# EAGLE board USBPowerCut (EAGLE 9.6.2)
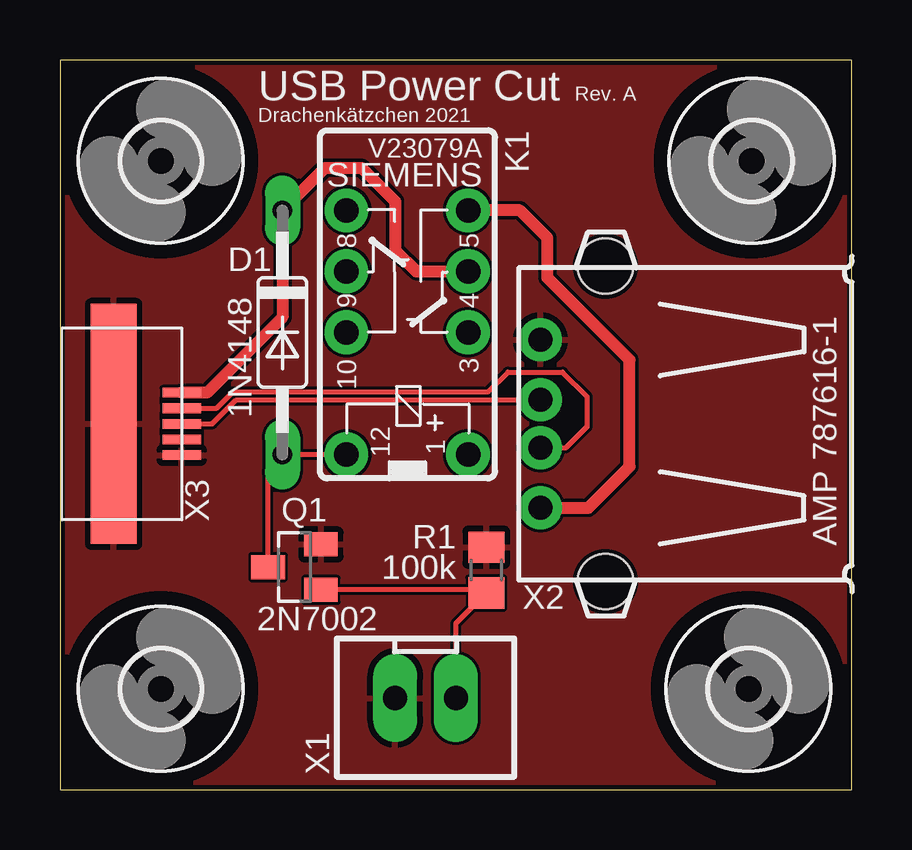
[diagram p0: board, top side]
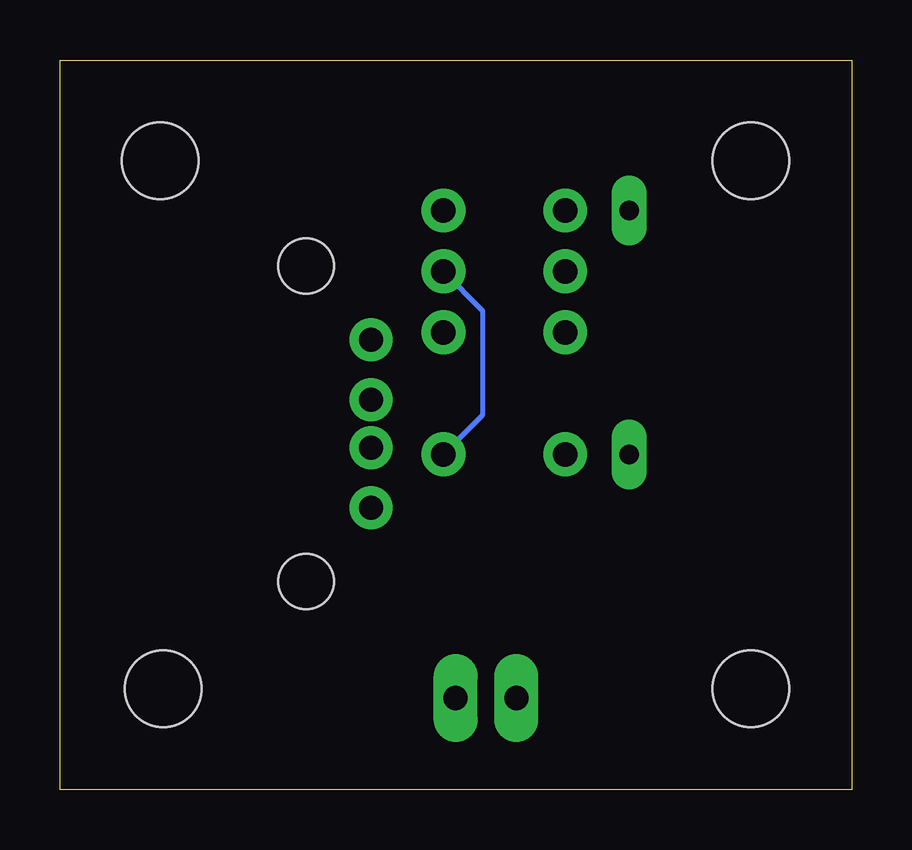
[diagram p1: board, bottom side, seen from below]

Size 33 x 30.4 mm. Coordinates in mm from the lower left corner, seen from the top.
Outline: 0,0 33,0 33,30.4 0,30.4 0,0
Copper layers (1*16): Top 0.035mm / dielectric 1.6mm / Bottom 0.035mm
Design rules "jlcpcb-2layers": minimum track width 5mil, minimum drill 0.3mm, track to track 5mil, track to pad 5mil, pad to pad 5mil, via to via 5mil, smd to smd 5mil, copper to edge 0.2mm, drill to drill 6mil, minimum pad ring 10mil, minimum via ring 3mil, stop-mask expansion 4mil, vias tented up to drill 0mil, thermal gap 10mil

## Footprints (pad centres in the part's own frame; a part is rotated, then mirrored left to right if it is on the bottom)
DO35-10 = drill 0.813 long: A 5.08,0; C -5.08,0
V23079A = drill 1.016 pad 1.778: 1 -5.08,-2.54; 3 0,-2.54; 4 2.54,-2.54; 5 5.08,-2.54; 8 5.08,2.54; 9 2.54,2.54; 10 0,2.54; 12 -5.08,2.54
SOT23 = smd 1 x 1.4: 1 -0.95,-1.1; 2 0.95,-1.1; 3 0,1.1
R0805 = smd 1.3 x 1.5: 1 -0.95,0; 2 0.95,0
3,2 = hole 3.2: 0,0
JST-XH-02-PACKAGE-LONG-PAD = drill 1.016 long: 1 -1.27,0; 2 1.27,0
USB = drill 1: 1 -3.5,12.99; 2 -1,12.99; 3 1,12.99; 4 3.5,12.99 | hole 2.3: -6.57,10.28; 6.57,10.28
MICRO_USB = smd 0.4 x 1.6: 1 -1.3,0; 2 -0.65,0; 3 0,0; 4 0.65,0; 5 1.3,0 | smd 10 x 1.9: GND 0,-2.84

## Placement (x,y rotation side)
D1  1N4148  [DO35-10]  9.27,19.05 270 top
K1  V23079-A1011-B301  [V23079A]  14.48,19.05 90 top
Q1  2N7002  [SOT23]  9.78,9.27 90 top
R1  100k  [R0805]  17.78,9.14 90 top
U$1  [3,2]  4.2,4.2 0 top
U$2  [3,2]  4.2,26.2 0 top
U$3  [3,2]  28.83,26.2 0 top
U$4  [3,2]  28.7,4.2 0 top
X1  JST-XH-02-PIN-LONG-PAD  [JST-XH-02-PACKAGE-LONG-PAD]  15.24,3.81 0 top
X2  AMP 787616-1  [USB]  33.02,15.24 90 top
X3  10104110-0001LF  [MICRO_USB]  5.08,15.24 270 top

## Library data of the parts
D1 = diode
K1 = Siemens-Rel
Q1 = nxp_60_1_1
R1 = rcl; SPICEPREFIX: R
U$1-U$4 = holes
X1 = Rembrandt Electronics - JST XH Connectors v1-0
X2 = con-amp
X3 = 10104110-0001LF; AVAILABILITY: In Stock; DESCRIPTION: USB - micro B USB 2.0 Receptacle Connector 5 Position Surface Mount, Right Angle; MF: Amphenol ICC; MP: 10104110-0001LF; PACKAGE: None; PRICE: None; PURCHASE-URL: https://pricing.snapeda.com/search/part/10104110-0001LF/?ref=eda

## Nets
D+: X2.3 X3.3
D-: X2.2 X3.2
GND: Q1.2 R1.2 X1.1 X2.4 X3.5 X3.GND
N$3: D1.A K1.12 Q1.3
N$4: K1.5 X2.1
N$5: Q1.1 R1.1 X1.2
VCC: D1.C K1.1 K1.4 X3.1

## Tracks (layer width: path | path; a pad name or v marks a point on that pad's centre or on a via)
D+
  Top 0.203: X3.3 6.35,15.24 7.35,16.24 X2.3
D-
  Top 0.203: X3.2 6.53,15.89 7.21,16.57 17.84,16.57 18.67,17.4 20.95,17.4 21.97,16.38 21.97,15.11 21.08,14.22 20.05,14.22 X2.2
GND
  pour Top: 0,30.48 33.02,30.48 33.02,0 0,0
N$3
  Top 0.203: K1.12 D1.A 8.68,13.38 Q1.3
N$4
  Top 0.508: X2.1 22.03,11.74 23.75,13.46 23.75,17.91 20.32,21.34 20.32,22.99 19.18,24.13 K1.5
N$5
  Top 0.203: Q1.1 17.65,8.32 R1.1 16.51,6.92 X1.2
VCC
  Top 0.508: K1.4 14.86,21.59 13.97,22.48 13.97,24.51 12.57,25.91 11.05,25.91 D1.C 9.27,19.68 6.13,16.54 X3.1
  Bottom 0.203: K1.1 15.37,15.62 15.37,19.94 K1.4

## Text on the board
tPlace: USB Power Cut | Rev. A | Drachenkätzchen 2021 | X3